# EAGLE board Supplemental Power Switch System (EAGLE 8.1.0)
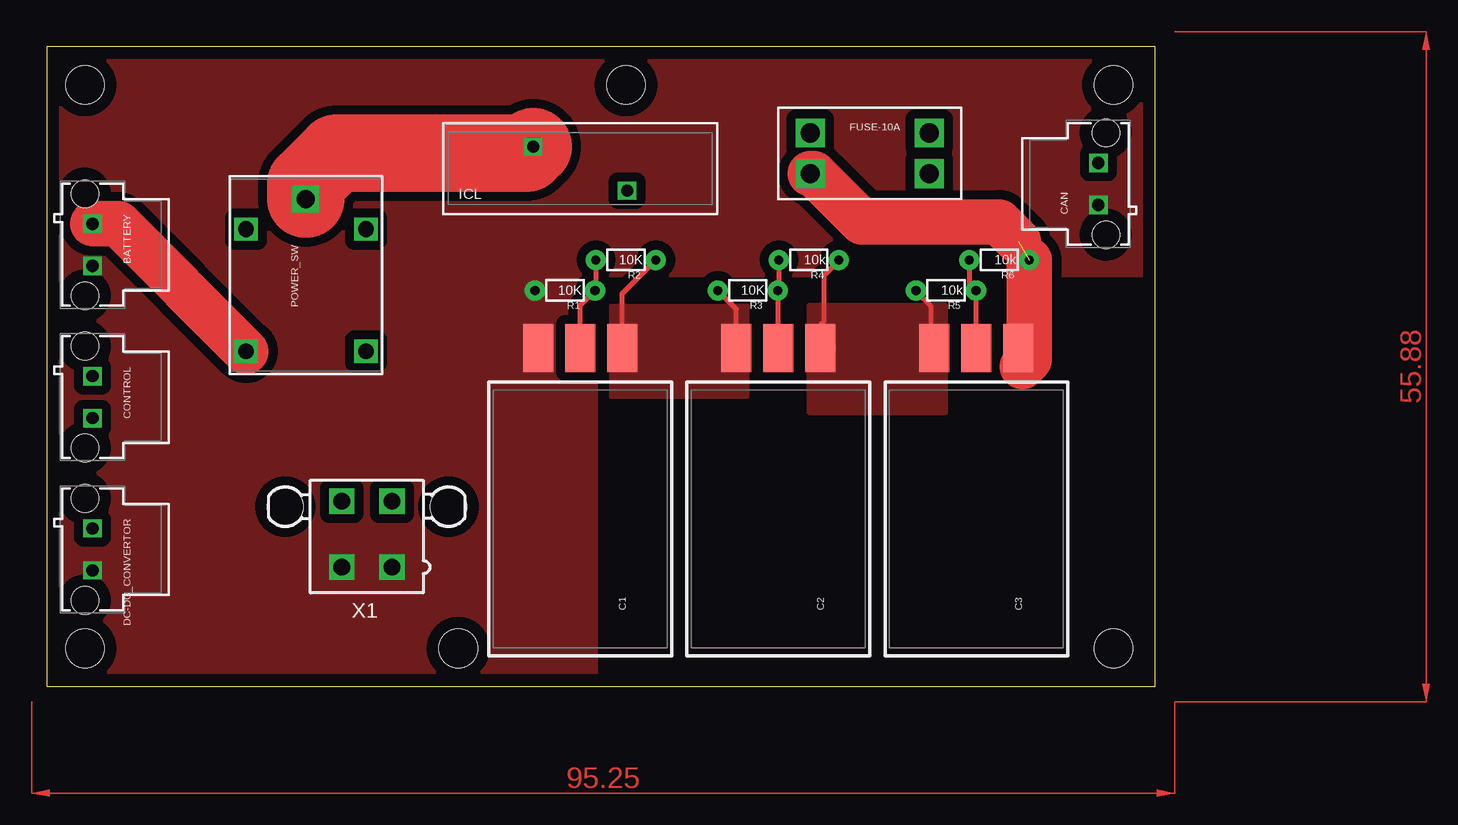
[diagram p0: board, top side]
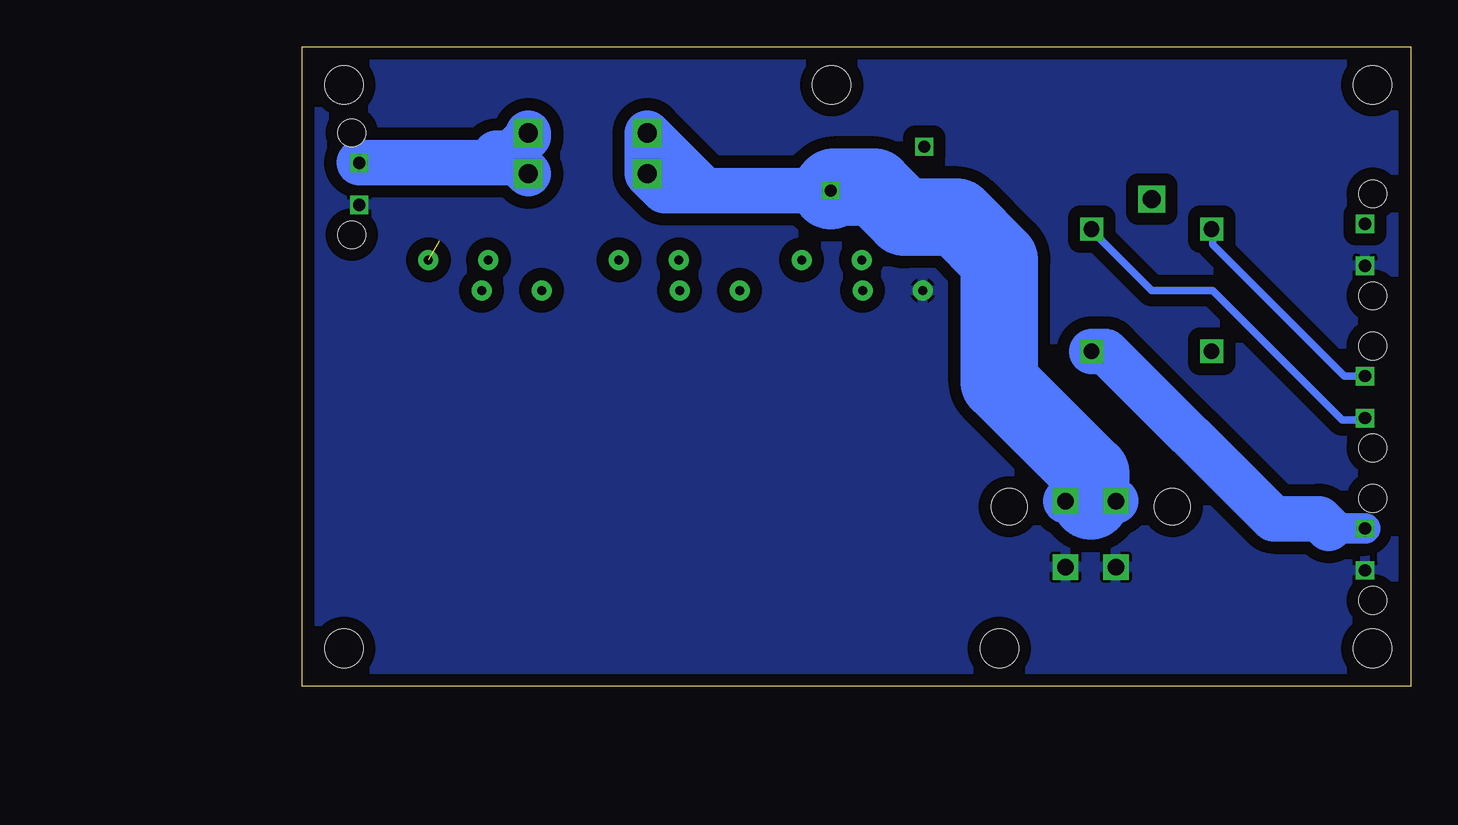
[diagram p1: board, bottom side, seen from below]

Size 92.38 x 53.33 mm. Coordinates in mm from the lower left corner, seen from the top.
Outline: 0,0 92.38,0 92.38,53.33 0,53.33 0,0
Copper layers (1*16): Top 0.035mm / dielectric 1.5mm / Bottom 0.035mm
Design rules "default": minimum track width 10mil, minimum drill 24mil, track to track 8mil, track to pad 8mil, pad to pad 8mil, via to via 8mil, smd to smd 8mil, copper to edge 40mil, drill to drill 8mil, minimum pad ring 10mil, minimum via ring 8mil, stop-mask expansion 4mil, vias tented up to drill 0mil, thermal gap 10mil
Holes 3.2 mm at 3.17,3.17 34.29,3.17 48.26,50.16 3.17,50.16 88.9,50.16 88.9,3.17
tKeepout: area 0,53.3 to 94,54.6; area 92.7,0 to 94,54.6; area -1.3,-1.3 to 94,0; area -1.3,-1.3 to 0,54.6

## Footprints (pad centres in the part's own frame; a part is rotated, then mirrored left to right if it is on the bottom)
172287-ULTRA-FIT = drill 1.02 square: 1 -1.75,0; 2 1.75,0 | hole 2.3: -4.25,-0.63; 4.25,-0.63
DMF = smd 4 x 2.5: + 14.25,-3.5; - 14.25,3.5; B 14.25,0
3568-MINI-297 = drill 1.6 square: P$1 4.96,1.7; P$2 4.96,-1.7; P$3 -4.96,1.7; P$4 -4.96,-1.7
SL22-2R515 = drill 1 square: 1 -3.9,1.825; 2 3.9,-1.825
G8QN-1C4 = drill 1.5 square: 1 -6.35,0 | drill 1.3 square: 2 -3.85,5; 3 6.35,5; 4 6.35,-5; 5 -3.85,-5
1/6W-RES = drill 0.762 pad 1.676: 1 -2.5,0; 2 2.5,0
5566-4 = drill 1.4 square: 1 2.1,-2.75; 2 -2.1,-2.75; 3 2.1,2.75; 4 -2.1,2.75 | hole 3: 6.8,2.29; -6.8,2.29

## Placement (x,y rotation side)
BATTERY  172287-11-02  [172287-ULTRA-FIT]  3.81,36.83 270 top
C1  SUPER-CAPACITOR  [DMF]  44.45,13.97 90 top
C2  SUPER-CAPACITOR  [DMF]  60.96,13.97 90 top
C3  SUPER-CAPACITOR  [DMF]  77.47,13.97 90 top
CAN  172287-11-02  [172287-ULTRA-FIT]  87.63,41.91 90 top
CONTROL  172287-11-02  [172287-ULTRA-FIT]  3.81,24.13 270 top
DC-DC_CONVERTOR  172287-11-02  [172287-ULTRA-FIT]  3.81,11.43 270 top
FRAME1  FRAME-LETTERNO_PACKAGE  [DUMMY]  -13.97,15.24 0 top  (outside the outline)
FUSE-10A  3568  [3568-MINI-297]  68.58,44.45 180 top
ICL  SL22-2R515  [SL22-2R515]  44.45,43.18 0 top
POWER_SW  SPDT_RELAY  [G8QN-1C4]  21.59,34.29 270 top
R1  10K  [1/6W-RES]  43.18,33.02 180 top
R2  10K  [1/6W-RES]  48.26,35.56 180 top
R3  10K  [1/6W-RES]  58.42,33.02 180 top
R4  10k  [1/6W-RES]  63.5,35.56 180 top
R5  10k  [1/6W-RES]  74.93,33.02 180 top
R6  10k  [1/6W-RES]  79.38,35.56 180 top
X1  5566-4  [5566-4]  26.67,12.7 0 top

## Library data of the parts
BATTERY C1-C3 CAN CONTROL DC-DC_CONVERTOR FUSE-10A ICL POWER_SW = Hooman
FRAME1 = SparkFun-Aesthetics; DESIGNER: Nobody; VERSION: v01
R1-R6 = SparkFun-Resistors
X1 = con-molex; OC_FARNELL: unknown; OC_NEWARK: unknown

## Nets
12V: C3.+ FUSE-10A.P$1 FUSE-10A.P$2 ICL.2 R6.1 X1.3 X1.4
C1-2: C1.+ C2.- R2.1 R3.2
C2-3: C2.+ C3.- R4.1 R5.2
GND: BATTERY.2 C1.- CAN.1 DC-DC_CONVERTOR.2 R1.2 X1.1 X1.2
MAIN_NO: DC-DC_CONVERTOR.1 POWER_SW.3
N$1: CAN.2 FUSE-10A.P$3 FUSE-10A.P$4
N$2: ICL.1 POWER_SW.1
N$3: C3.B R5.1 R6.2
N$5: C2.B R3.1 R4.2
N$7: C1.B R1.1 R2.2
SUPP_NC: BATTERY.1 POWER_SW.4
ZEVA+: CONTROL.2 POWER_SW.2
ZEVA-: CONTROL.1 POWER_SW.5

## Tracks (layer width: path | path; a pad name or v marks a point on that pad's centre or on a via)
12V  (1 unrouted)
  Top 0.406: C3.+ 80.97,34.66 R6.1
  Top 3.81: 80.97,37.14 80.01,38.1 79.38,38.73 67.94,38.73 63.93,42.75 FUSE-10A.P$1 | R6.1 81.88,27.27 81.28,26.67
  Bottom 3.81: ICL.2 58.42,41.35 | 58.42,41.35 62.23,41.35 FUSE-10A.P$1 FUSE-10A.P$2 58.83,41.35 58.42,41.35 | X1.4 26.67,15.45 X1.3
  Bottom 6.452: 26.67,15.45 26.67,17.78 34.29,25.4 34.29,35.56 37.85,39.12 42.2,39.12 44.72,41.64 48.07,41.64 ICL.2
C1-2
  Top 0.406: C1.+ 47.95,32.75 R2.1 | C2.- 57.46,31.48 R3.2
  pour Top (isolate 0.762, no thermals): 46.99,31.75 46.99,24.13 58.42,24.13 58.42,31.75
C2-3
  Top 0.406: R4.1 66,35.52 64.77,34.29 64.77,30.48 64.46,30.17 C2.+ | R5.2 72.43,32.98 73.66,31.75 73.66,28.53 C3.-
  Top 2.54: 64.49,28.22 C2.+ 64.46,28.9
  pour Top (no thermals): 63.5,31.75 63.5,22.86 74.93,22.86 74.93,31.75
GND
  pour Bottom (isolate 1.016): 0,52.07 92.71,52.07 92.71,0 0,0
  pour Top (isolate 0.762, no thermals): 0,53.34 92.71,53.34 92.71,34.29 45.72,34.29 45.72,0 0,0
MAIN_NO
  Bottom 2.54: DC-DC_CONVERTOR.1 6.83,13.18 7.62,13.97
  Bottom 3.81: POWER_SW.3 25.4,27.94 11.43,13.97 7.62,13.97 6.83,13.18
N$1
  Bottom 3.81: 74.45,43.66 CAN.2 | 74.45,43.66 FUSE-10A.P$3 | FUSE-10A.P$4 73.54,45.84 74.93,44.45 76.2,44.45 75.24,44.45 74.45,43.66
N$2
  Top 6.452: POWER_SW.1 21.59,41.91 24.13,44.45 39.99,44.45 ICL.1
N$3
  Top 0.406: C3.B 77.47,32.98 R5.1 76.88,33.58 R6.2
N$5
  Top 0.406: C2.B 60.96,32.98 R3.1 61,33.1 R4.2
N$7
  Top 0.406: C1.B 44.45,31.79 R1.1 45.76,33.1 R2.2
SUPP_NC
  Top 3.81: BATTERY.1 5.95,38.58 POWER_SW.4
ZEVA+
  Bottom 0.61: POWER_SW.2 26.59,38.02 21.59,33.02 16.51,33.02 5.71,22.23 4.33,22.23 4.2,22.35 3.84,22.35 CONTROL.2
ZEVA-
  Bottom 0.61: CONTROL.1 5.56,25.88 16.51,36.83 16.51,38.06 POWER_SW.5
(copper drawn outside any net)
  shapes: Top area x2